# Altium PCB board_supply_440v.PcbDoc
Units mm, origin at the board's own origin, x right, y up, seen from the top; angles counter-clockwise.
Board outline 47 x 77.5 mm, 2 copper layers (Top Layer, Bottom Layer), stack 1.48 mm thick; 106 components, 48 nets, 252 pads, 62 vias.
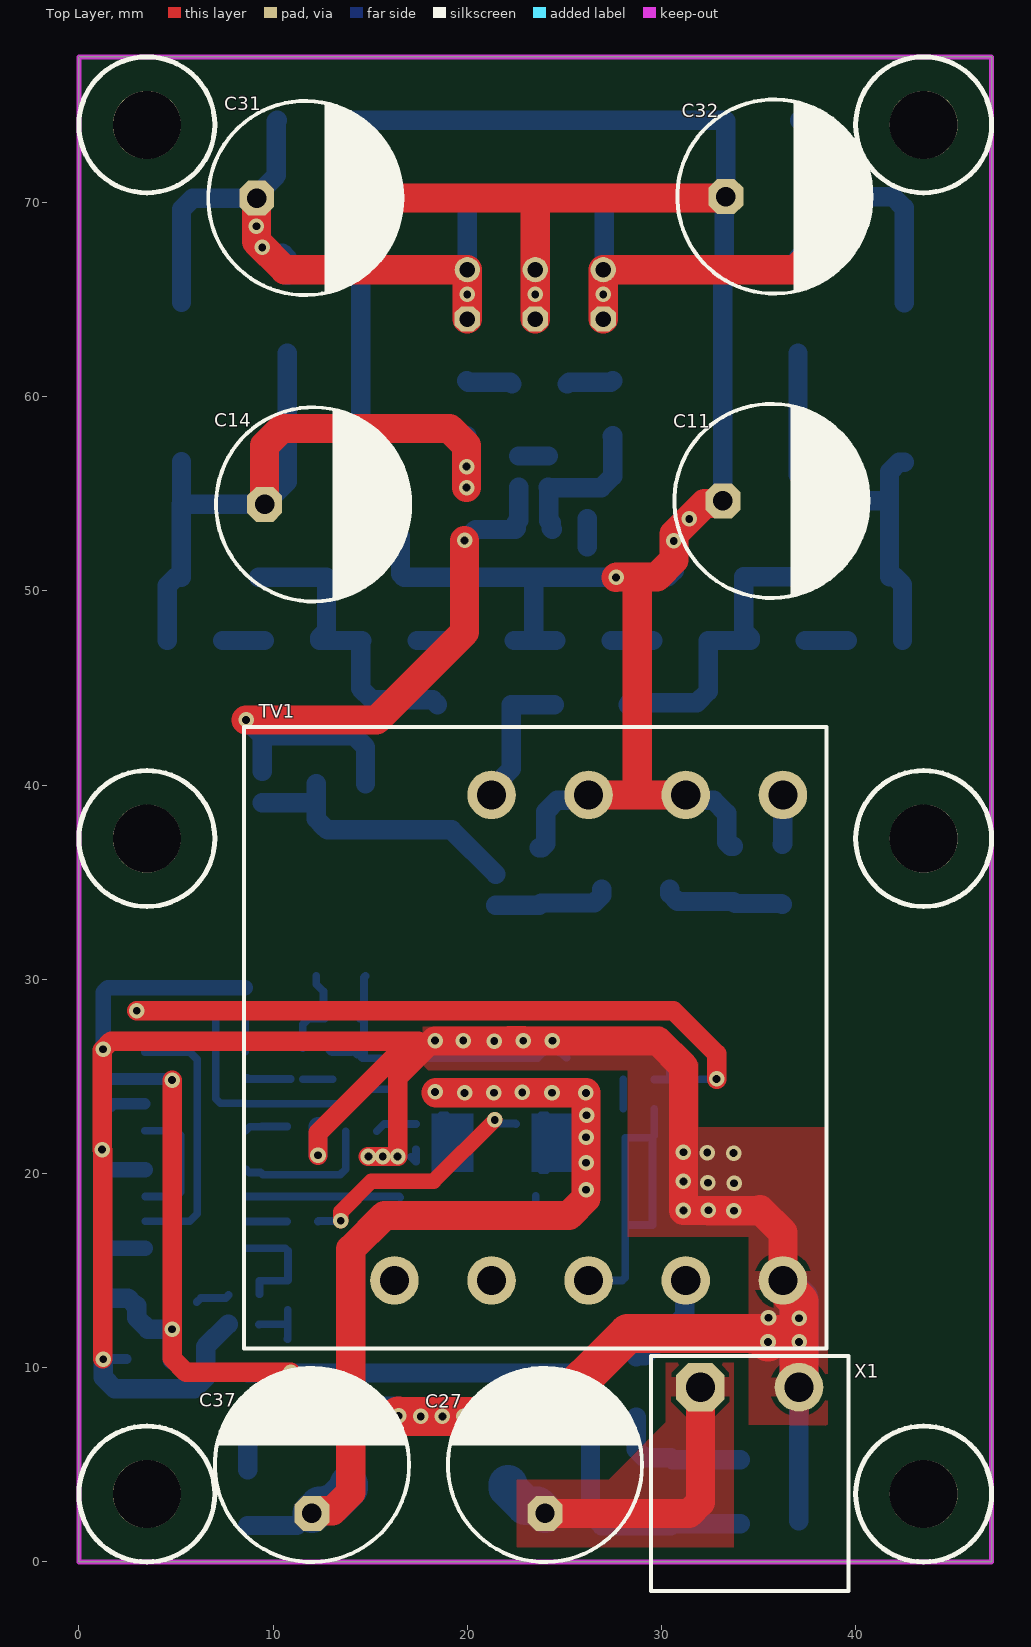
[diagram p0: Top Layer view]
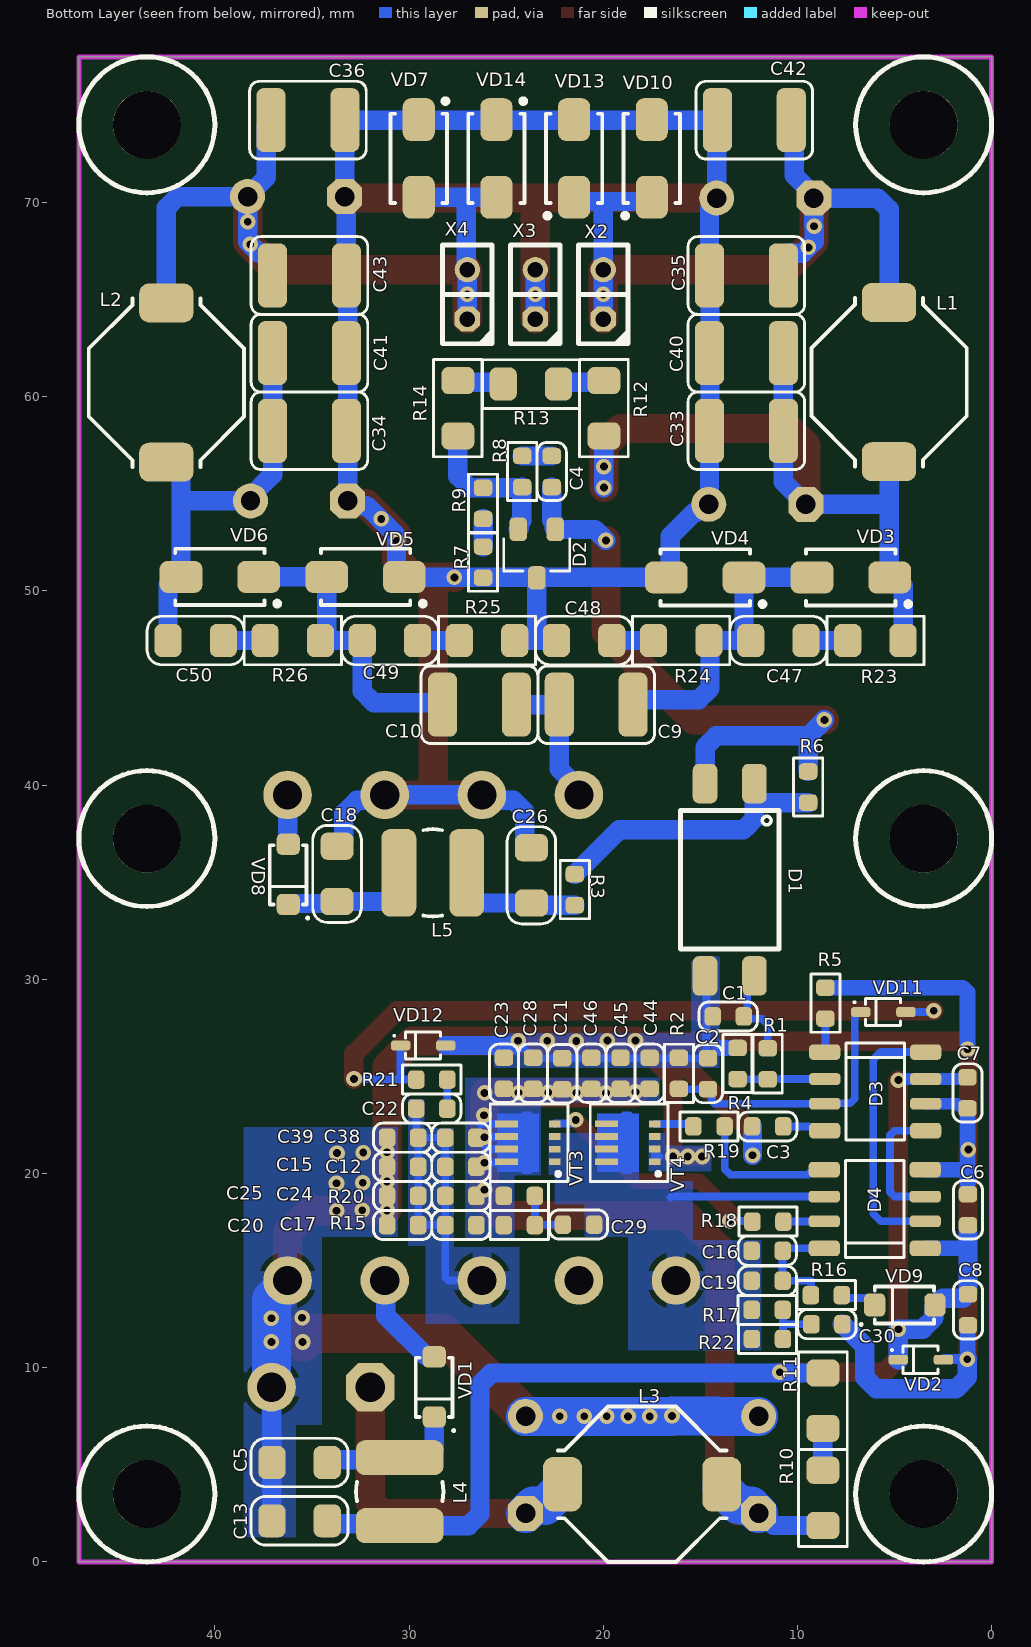
[diagram p1: Bottom Layer view, seen from below]
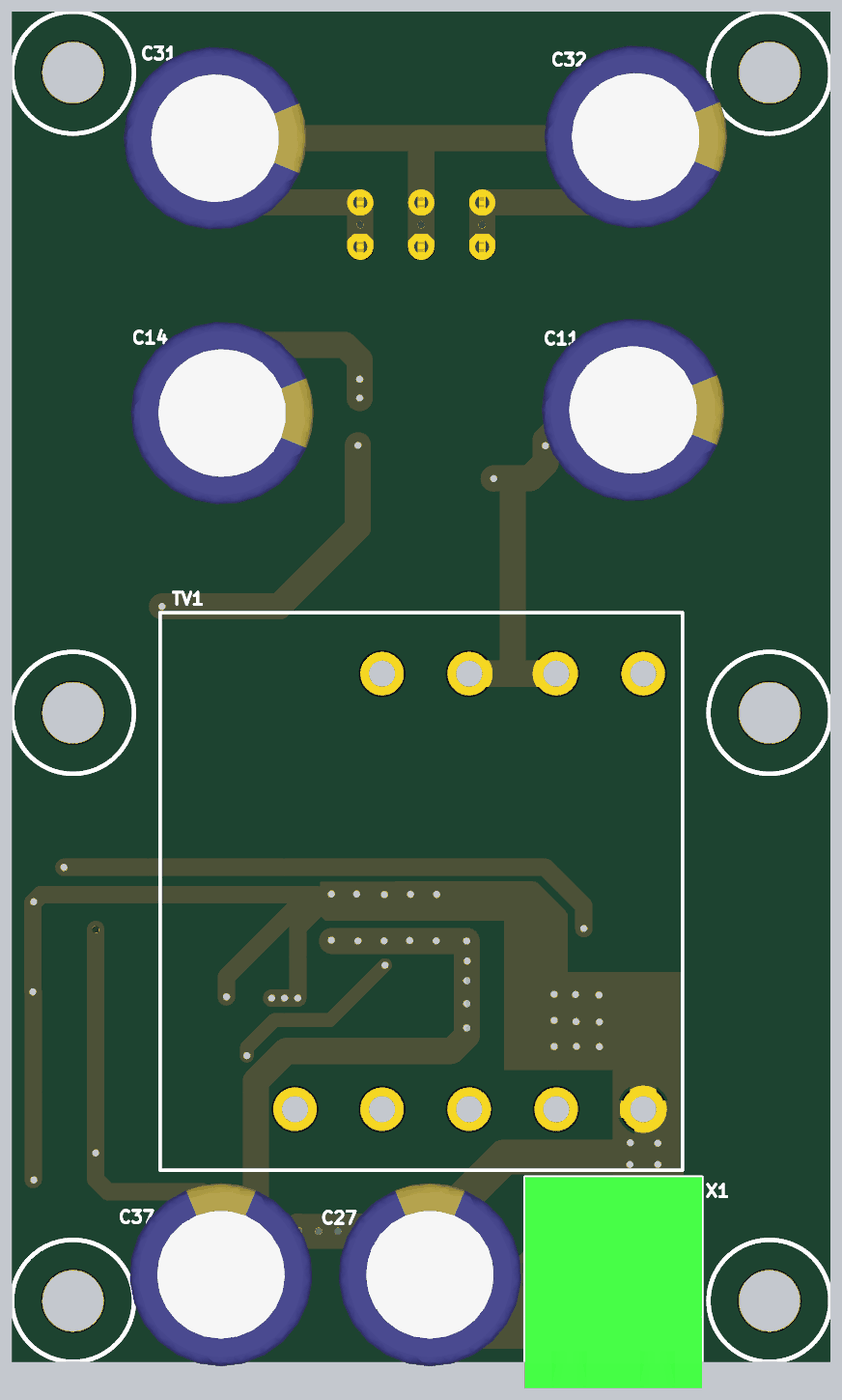
[diagram p2: 3D render of the assembled board from above, using the file's embedded part models]
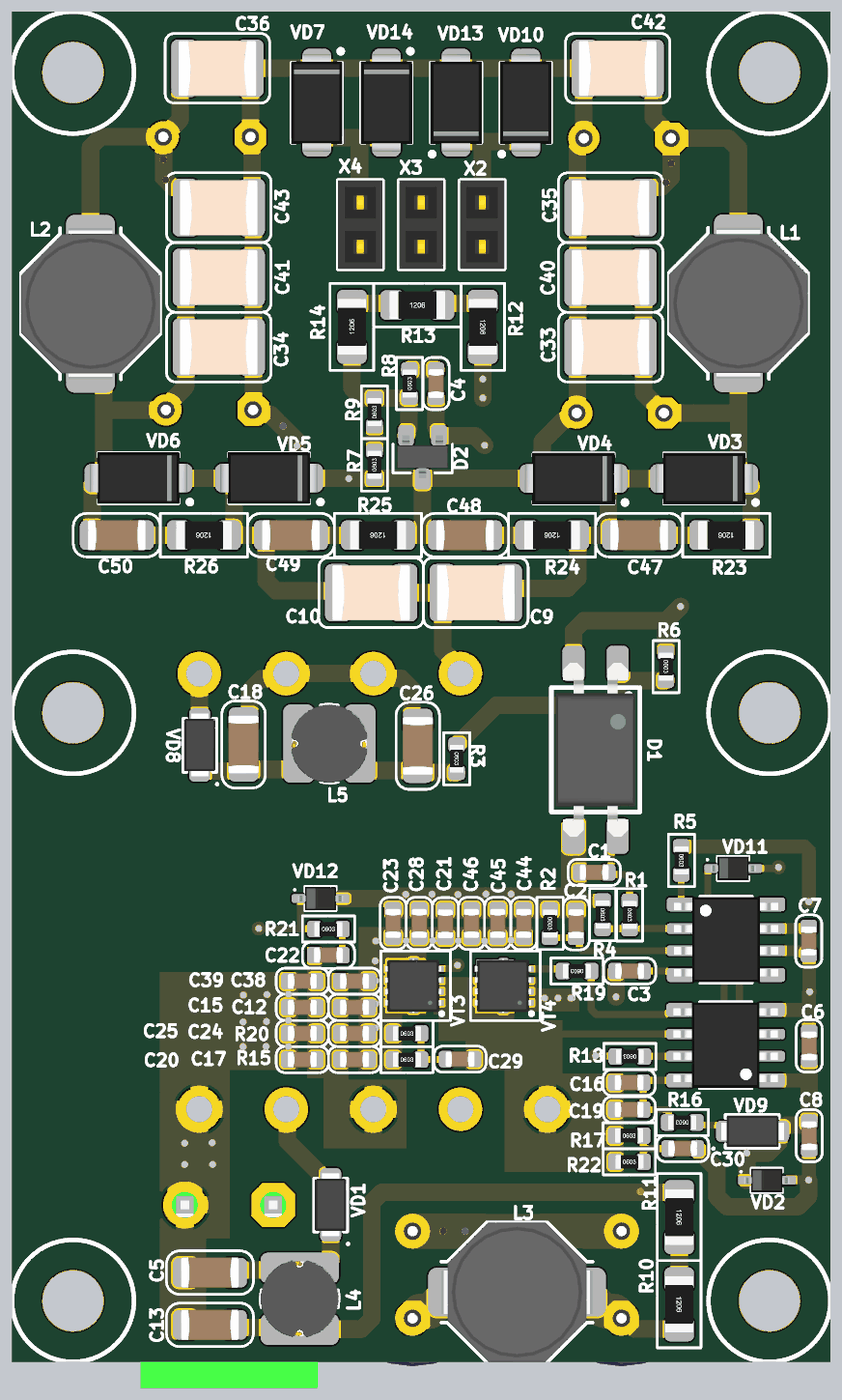
[diagram p3: 3D render of the assembled board from below, using the file's embedded part models]

## Layer stack, top to bottom
Top Solder: solder mask 0.0102, Solder Resist, Dk 3.5
Top Layer: signal copper 0.0356
Dielectric 1: dielectric 1.4086, FR-4, Dk 4.8
Bottom Layer: signal copper 0.0356
Bottom Solder: solder mask 0.0102, Solder Resist, Dk 3.5

## Board outline
0,0 0,77.5 47,77.5 47,0

## Design rules (kind name [scope] priority, off if disabled: settings)
Clearance PRIM_SEC [InNetClass('PRIM') vs InNetClass('SEC')] p1: gap=6 ignorepadtopadclearanceinfootprint=FALSE
Clearance HOLE [OnLayer('Keep-Out Layer') vs AsMM(HoleDiameter) >3] p2: gap=0.25 ignorepadtopadclearanceinfootprint=TRUE
Clearance HV_SEC [InNet('+450В') or InNet('OUT1.1') or InNet('-450В') or InNet('-400В') or InNet('BASE1.1') vs InNet('BASE1.2') or InNet('GND_SEC')or InNet('MID')] p3: gap=2 ignorepadtopadclearanceinfootprint=FALSE
Clearance +HV_-HV [InNet('+450В') or InNet('OUT1.1') or InNet('BASE1.1') vs InNet('-450В')] p4: gap=4 ignorepadtopadclearanceinfootprint=TRUE
Clearance HV_MID [InNet('MID1') or InNet('MID2') or InNet('MID2_VD')  or InNet('MID2_VD')] p5: gap=1 ignorepadtopadclearanceinfootprint=FALSE
Clearance Keep-Out [OnLayer('Top Layer') OR OnLayer('Bottom Layer') vs OnLayer('Keep-Out Layer')] p6: gap=0.5 ignorepadtopadclearanceinfootprint=FALSE
Clearance [All] p7: gap=0.25 ignorepadtopadclearanceinfootprint=FALSE
ComponentClearance [All] p1: gap=0 collisioncheckmode=3 verticalgap=0 showdistances=FALSE
Height [All] p1: minheight=0 maxheight=70 prefheight=12.7
HoleSize [All] p1: absolutevalues=TRUE maxlimit=4 minlimit=0.025 maxpercent=80.000 minpercent=20.000
PolygonConnect [All] p1: thpad.connectstyle=Relief thpad.reliefconductorwidth=1 thpad.reliefentries=4 thpad.polygonreliefangle="90 Angle" thpad.airgapwidth=0.25 smdpad.connectstyle=Direct smdpad.reliefconductorwidth=0.4 smdpad.reliefentries=4 smdpad.polygonreliefangle="90 Angle" smdpad.airgapwidth=0.3 via.connectstyle=Direct via.reliefconductorwidth=0.254 via.reliefentries=4 via.polygonreliefangle="90 Angle" via.airgapwidth=0.254
RoutingVias [All] p1: holewidth=0.4 width=0.8 viastyle="Through Hole" minholewidth=0.3 minwidth=0.6 maxholewidth=1 maxwidth=2
SolderMaskExpansion [All] p1: expansion=0.102 istentingtop=FALSE
Width [All] p1: maxlimit=5 minlimit=0.25 preferedwidth=0.8 bottomlayer_prefwidth=0.4 minimp=50.000000 maximp=50.000000 favimp=50.000000
27 further rules are at their usual default settings.

## Classes and differential pairs
net class SEC: +12В +450В -450В GND_SEC NetC4_1 NetC4_2 NetC9_1 NetC9_2 NetC10_1 NetC18_1 NetC31_1 NetC32_2 NetC47_2 NetC48_2 NetC49_2 NetC50_2 NetD1_1 NetD2_2 NetR7_2 NetR12_1 NetR13_1 NetTV1_7 NetX2_4 NetX3_4
net class PRIM: 100В +12В_PRIM GND NetC1_2 NetC3_2 NetC5_1 NetC12_1 NetC16_1 NetC16_2 NetC22_2 NetC27_1 NetC29_2 NetC30_2 NetD3_1 NetD3_2 NetD3_5 NetD3_8 NetD4_5 NetD4_7 NetR10_1 NetR16_1 NetR18_2 NetR19_2 NetR21_1 NetTV1_5 NetX1_2 OC

## Components (designator, comment, footprint, x,y, rotation, side; value= is the part's Value field where it differs from the comment)
C1 "*" C-0603 13.564,28.092 r180 bottom
C2 "*" C-0603 14.605,25.146 r270 bottom
C3 "*" C-0603 11.532,22.428 r180 bottom
C4 "*" C-0603 22.649,56.15 r270 bottom
C5 "22мк" C-1206 35.636,5.123 r0 bottom
C6 "*" C-0603 1.219,18.136 r270 bottom
C7 "*" C-0603 1.245,24.155 r90 bottom
C8 "*" C-0603 1.219,12.979 r90 bottom
C9 "0.1мк" C-1812 20.364,44.144 r0 bottom
C10 "0.1мк" C-1812 26.374,44.144 r180 bottom
C11 "10мк" "CAP: D10C5H16" 35.662,54.635 r0 top
C12 "*" C-0603 27.33,20.348 r180 bottom
C13 "22мк" C-1206 35.636,2.123 r0 bottom
C14 "10мк" "CAP: D10C5H16" 12.065,54.458 r0 top
C15 "*" C-0603 30.33,20.348 r180 bottom
C16 "*" C-0603 11.557,16.027 r180 bottom
C17 "*" C-0603 27.33,17.348 r180 bottom
C18 "22мк" C-1206 33.706,35.433 r90 bottom
C19 "*" C-0603 11.557,14.478 r180 bottom
C20 "*" C-0603 30.33,17.348 r180 bottom
C21 "*" C-0603 22.112,25.143 r270 bottom
C22 "*" C-0603 28.829,23.343 r180 bottom
C23 "*" C-0603 25.112,25.165 r270 bottom
C24 "*" C-0603 27.33,18.848 r180 bottom
C25 "*" C-0603 30.33,18.848 r180 bottom
C26 "22мк" C-1206 23.698,35.357 r90 bottom
C27 "22мк" "CAP: D10C5H16" 24,5 r90 top
C28 "*" C-0603 23.612,25.165 r270 bottom
C29 "*" C-0603 21.273,17.374 r0 bottom
C30 "*" C-0603 8.484,12.243 r0 bottom
C31 "10мк" "CAP: D10C5H16" 11.659,70.231 r0 top
C32 "10мк" "CAP: D10C5H16" 35.814,70.307 r0 top
C33 "0.1мк" C-1812 12.627,58.245 r0 bottom
C34 "0.1мк" C-1812 35.127,58.245 r0 bottom
C35 "0.1мк" C-1812 12.627,66.245 r0 bottom
C36 "0.1мк" C-1812 35.204,74.244 r0 bottom
C37 "22мк" "CAP: D10C5H16" 12,5 r90 top
C38 "*" C-0603 27.33,21.848 r180 bottom
C39 "*" C-0603 30.33,21.848 r180 bottom
C40 "0.1мк" C-1812 12.627,62.245 r0 bottom
C41 "0.1мк" C-1812 35.127,62.245 r0 bottom
C42 "0.1мк" C-1812 12.217,74.244 r0 bottom
C43 "0.1мк" C-1812 35.127,66.245 r0 bottom
C44 "*" C-0603 17.612,25.165 r270 bottom
C45 "*" C-0603 19.112,25.165 r270 bottom
C46 "*" C-0603 20.612,25.165 r270 bottom
C47 "*" C-1206 10.984,47.448 r180 bottom
C48 "*" C-1206 20.984,47.448 r180 bottom
C49 "*" C-1206 30.984,47.448 r180 bottom
C50 "*" C-1206 40.984,47.448 r180 bottom
D1 "PC817" DIP4-SMD 13.487,35.128 r270 bottom
D2 "TL431DBZ" SOT-23-3 23.422,51.923 r270 bottom
D3 "UCC25600" 8-SOIC 5.995,24.232 r180 bottom
D4 "IRS21867S" 8-SOIC 6.02,18.178 r0 bottom
L1 "CDRH8D43" L-8.3x8.3x4.5 5.283,60.757 r270 bottom
L2 "CDRH8D43" L-8.3x8.3x4.5 42.494,60.731 r270 bottom
L3 "CDRH8D43" L-8.3x8.3x4.5 18,4 r0 bottom
L4 "SDR0403-3R9ML" L-4.5x4x3.2 30.48,3.621 r90 bottom
L5 "SDR0403-3R9ML" L-4.5x4x3.2 28.778,35.484 r0 bottom
R1 "*" R-0603 11.532,25.654 r270 bottom
R2 "*" R-0603 16.104,25.159 r270 bottom
R3 "*" R-0603 21.463,34.62 r270 bottom
R4 "*" R-0603 13.081,25.667 r270 bottom
R5 "*" R-0603 8.56,28.778 r270 bottom
R6 "*" R-0603 9.449,39.903 r270 bottom
R7 "*" R-0603 26.187,51.486 r90 bottom
R8 "*" R-0603 24.173,56.15 r90 bottom
R9 "*" R-0603 26.187,54.508 r90 bottom
R10 "20к" R-1206 8.687,3.302 r270 bottom
R11 "20к" R-1206 8.687,8.306 r270 bottom
R12 "180к" R-1206 19.964,59.408 r270 bottom
R13 "180к" R-1206 23.726,60.655 r180 bottom
R14 "180к" R-1206 27.483,59.408 r90 bottom
R15 "*" R-0603 24.319,17.348 r180 bottom
R16 "*" R-0603 8.509,13.741 r0 bottom
R17 "*" R-0603 11.557,12.979 r180 bottom
R18 "*" R-0603 11.519,17.526 r0 bottom
R19 "*" R-0603 14.554,22.428 r0 bottom
R20 "*" R-0603 24.319,18.848 r180 bottom
R21 "*" R-0603 28.829,24.841 r180 bottom
R22 "*" R-0603 11.544,11.481 r180 bottom
R23 "*" R-1206 5.984,47.448 r0 bottom
R24 "*" R-1206 15.984,47.448 r0 bottom
R25 "*" R-1206 25.984,47.448 r0 bottom
R26 "*" R-1206 35.984,47.448 r0 bottom
TV1 "2xT26.9/14.7/11.2" EE30 23.5,27 r0 top locked
VD1 "MBR0540" SOD-123FL 28.702,9.017 r90 bottom
VD2 "14В" SOD-323 3.658,10.414 r180 bottom
VD3 "MURA160T3G" DO-214AC 7.25,50.698 r0 bottom
VD4 "MURA160T3G" DO-214AC 14.75,50.698 r0 bottom
VD5 "MURA160T3G" DO-214AC 32.24,50.724 r0 bottom
VD6 "MURA160T3G" DO-214AC 39.74,50.724 r0 bottom
VD7 "P4SMAJ440A" DO-214AC 29.5,72.271 r270 bottom
VD8 "MBR0540" SOD-123FL 36.22,35.408 r90 bottom
VD9 "MBR0540" SOD-123FL 4.47,13.233 r180 bottom
VD10 "P4SMAJ440A" DO-214AC 17.5,72.271 r90 bottom
VD11 "1N4148WS" SOD-323 5.588,28.321 r180 bottom
VD12 "1N4148WS" SOD-323 29.286,26.594 r180 bottom
VD13 "P4SMAJ440A" DO-214AC 21.5,72.271 r90 bottom
VD14 "P4SMAJ440A" DO-214AC 25.5,72.271 r270 bottom
VT3 "__GENERIC-N" WDFN-8 23.82,21.583 r90 bottom
VT4 "__GENERIC-N" WDFN-8 18.669,21.585 r90 bottom
X1 "2EDGR-5.08-02P-14" 2EDGR-5.08-02P-14-00AH 32,9 r0 top
X2 "PBS-2" PBS-2 20,64 r90 bottom
X3 "PBS-2" PBS-2 23.5,64 r90 bottom
X4 "PBS-2" PBS-2 27,64 r90 bottom

## Footprints (in the part's own frame and the unit in brackets; to place one, negate y for a bottom-side part, rotate by r counter-clockwise, add the part's x,y. Pads: shape width x height; smd on the part's side, far side on the other; paste and mask are expansions set on the pad)
2EDGR-5.08-02P-14-00AH [mm]
  oct 2.5x2.5 hole 1.5: 1(0,0)
  round 2.5 hole 1.5: 2(5.08,0)
  silkscreen extent -2.54,-10.5 7.62,1.6, body extent -2.54,-10.5 7.62,1.6, height 8.25
8-SOIC [mm] "SOIC, 8-Leads, Body 4,90x3,90mm, Pitch 1,27mm, IPC Medium Density"
  rrect50% 1.6x0.8 smd: 1(-2.6,2.025) 4(-2.6,-2.025) 5(2.6,-2.025) 8(2.6,2.025)
  rrect50% 1.6x0.6 smd: 2(-2.6,0.635) 3(-2.6,-0.635) 6(2.6,-0.635) 7(2.6,0.635)
  silkscreen extent -1.5,-2.5 1.5,2.5, body extent -3,-2.45 3,2.45, height 1.75
C-0603 [mm] "Chip Capacitor, 2-Leads, Body 1,60x0,83mm, IPC Medium Density"
  rrect50% 0.85x0.95 smd: 1(-0.8,0) 2(0.8,0)
  silkscreen extent -1.5,-0.75 1.5,0.75, body extent -0.85,-0.45 0.85,0.45, height 0.9
C-1206 [mm] "Chip Capasitor, 2-Leads, Body 3,20x1,60mm, IPC Medium Density"
  rrect50% 1.4x1.7 smd: 1(-1.425,0) 2(1.425,0)
  silkscreen extent -2.5,-1.25 2.5,1.25, body extent -1.67,-0.87 1.68,0.88, height 1.75
C-1812 [mm] "Chip Capacitor, 2-Leads, Body 4,50x3,20mm, IPC Medium Density"
  rrect50% 1.5x3.3 smd: 1(-1.9,0) 2(1.9,0)
  silkscreen extent -3,-2 3,2, body extent -2.25,-1.6 2.25,1.6, height 2.81
"CAP: D10C5H16" [mm]
  oct 1.8x1.8 hole 1: 1(-2.5,0)
  round 1.8 hole 1: 2(2.5,0)
  silkscreen extent -5,-5 5,5, body extent -5.25,-5.25 5.25,5.25, height 17.55
DIP4-SMD [mil]
  rrect50% 80x50 smd: 1(-195,50) 2(-195,-50) 3(195,-50) 4(195,50)
  silkscreen extent -141,-100 141,100, body extent -197,-90 197,90, height 152
DO-214AC [mm] "SMA 2-Leads, Body 2,55x5,00mm, IPC Medium Density"
  rrect50% 2.2x1.65 smd: 1(2,0) 2(-2,0)
  silkscreen extent -3.07,-1.45 2.3,1.5, body extent -2.8,-1.47 2.8,1.48, height 2.7
EE30 [mm]
  round 2.5 hole 1.5 paste-25.4: 2(-7.25,-12.5) 3(-2.25,-12.5) 4(2.75,-12.5) 5(7.75,-12.5) 6(12.75,-12.5) 7(12.75,12.5) 8(7.75,12.5) 9(2.75,12.5) 10(-2.25,12.5)
  silkscreen extent -15,-16 15,16, body extent -15.05,-16 15.05,16, height 21.25
L-4.5x4x3.2 [mm]
  rrect50% 1.8x4.5 smd: 1(-1.75,0) 2(1.75,0)
  silkscreen extent -0.49,-2.25 0.49,2.25, body extent -2.2,-2.25 2.2,2.25, height 3.25
L-8.3x8.3x4.5 [mm] "Дроссель SMD"
  rrect50% 2x2.8 smd: 1(-4.1,0) 2(4.1,0)
  silkscreen extent -4.34,-4 4.34,4, body extent -4.34,-4 4.34,4, height 4.5
PBS-2 [mm]
  oct 1.3x1.3 hole 0.8: 1(0,0)
  round 1.3 hole 0.8: 2(2.54,0)
  silkscreen extent -1.27,-1.27 3.81,1.27, body extent -1.27,-1.27 3.81,1.27, height 8.55
R-0603 [mm] "Chip Capacitor, 2-Leads, Body 1,60x0,83mm, IPC Medium Density"
  rrect50% 0.85x0.95 smd: 1(-0.8,0) 2(0.8,0)
  silkscreen extent -1.5,-0.75 1.5,0.75, body extent -0.8,-0.4 0.8,0.4, height 0.45
R-1206 [mm] "Chip Resistor, 2-Leads, Body 3,20x1,60mm, IPC Medium Density"
  rrect50% 1.4x1.7 smd: 1(-1.425,0) 2(1.425,0)
  silkscreen extent -2.5,-1.25 2.5,1.25, body extent -1.6,-0.8 1.6,0.8, height 0.6
SOD-123FL [mm] "SODFL, 2-Leads, Body 1,70x3,60mm, IPC Medium Density"
  rrect50% 1.1x1.2 smd: 1(1.55,0) 2(-1.55,0)
  silkscreen extent -2.3,-1.05 1.5,0.95, body extent -1.8,-0.9 1.8,0.9, height 1.3
SOD-323 [mm] "SOD-323 SODFL, 2-Leads, Body 1,30x2,60mm, IPC Medium Density"
  rrect50% 1x0.5 smd: 1(1.175,0) 2(-1.15,0)
  silkscreen extent -1.52,-0.7 0.9,0.7, body extent -1.3,-0.67 1.3,0.67, height 1.1
SOT-23-3 [mm] "SOT23, 3-Leads, Body 2,90x2,30mm, Pitch 0,95mm, IPC Medium Density"
  rrect50% 1.2x0.9 smd: 1(-1.25,0.95) 2(-1.25,-0.95) 3(1.25,0)
  silkscreen extent -0.75,-1.7 0.9,1.7, body extent -1.27,-1.46 1.21,1.46, height 1
WDFN-8 [mm]
  rect 0.35x1.2 smd: D(-0.973,1.166) D(-0.323,1.166) D(0.327,1.166) D(0.977,1.166)
  rect 0.35x0.6 smd: G(0.973,-1.316) S(-0.977,-1.316) S(-0.327,-1.316) S(0.323,-1.316)
  Top Layer region: -1.5,-0.5 -1.5,-0.186 -1.6,-0.086 -1.6,0.318 -1.5,0.417 -1.5,1.65 1.5,1.65 1.5,0.417 1.6,0.318 1.6,-0.086 1.5,-0.187 1.5,-0.5
  silkscreen extent -2,-2 2,2, body extent -1.55,-1.47 1.55,1.73, height 0.8

## Part data
C1 C2 C3 C4 C6 C7 C8 C12 C15 C16 C17 C19 C20 C21 C22 C23 C24 C25 C28 C29 C30 C38 C39 C44 C45 C46: library part C0603, Package=C-0603, ComponentDescription="Конденсатор керамический SMD, C-0603, *В, *, *", ComponentType="Конденсатор керамический SMD"
C5 C13 C18 C26: library part C1206, Dielectric=X7R, Package=C-1206, Voltage=25, ComponentDescription="Конденсатор керамический SMD, C-1206, 25В, 22мк, X7R", ComponentType="Конденсатор керамический SMD"
C9 C10 C33 C34 C35 C36 C40 C41 C42 C43: library part C1812, Dielectric=X7R, Package=C-1812, Voltage=630, ComponentDescription="Конденсатор керамический SMD, C-1812, 630В, 0.1мк, X7R", ComponentType="Конденсатор керамический SMD"
C11 C14 C31 C32: library part "Aluminum electrolytic capacitor", "Конденсатор электролитический", Package="CAP: D13C5H25", Voltage=500В, ComponentDescription="Конденсатор электролитический, 10мк, 500В, ESR, CAP: D13C5H25", ComponentType="Конденсатор электролитический", Type=ESR
C27 C37: library part "Aluminum electrolytic capacitor", "Конденсатор электролитический", Package="CAP: D10C5H16", Voltage=160В, ComponentDescription="Конденсатор электролитический, 22мк, 160В, ESR, CAP: D10C5H16", ComponentType="Конденсатор электролитический", Type=ESR
C47 C48 C49 C50: library part C1206, Package=C-1206, ComponentDescription="Конденсатор керамический SMD, C-1206, *В, *, *", ComponentType="Конденсатор керамический SMD"
D1: "Оптрон с транзисторным выходом", Package=DIP4-SMD, ComponentDescription="Оптрон с транзисторным выходом, PC817, DIP4-SMD", ComponentType="Оптрон с транзисторным выходом"
D2: "Микросхема ИОН", Package=SOT-23-3, ComponentDescription="Микросхема ИОН, TL431DBZ, SOT-23-3", ComponentType="Микросхема ИОН"
D3: "Микросхема контроллер LLC", Package=8-SOIC, ComponentDescription="Микросхема контроллер PWM, UCC25600, 8-SOIC", ComponentTypе="Микросхема контроллер PWM"
D4: "Микросхема полумостовой драйвер", Package=8-SOIC, ComponentDescription="Микросхема контроллер PWM, IRS21867S, 8-SOIC", ComponentTypе="Микросхема контроллер PWM"
L1 L2 L3: "SMD дроссель", Package=L-8.3x8.3x4.5, ComponentDescription="SMD дроссель, CDRH8D43, L-8.3x8.3x4.5", ComponentTypе="SMD дроссель"
L4 L5: Package=L-4.5x4x3.2, ComponentDescription="ЭМИ фильтр индуктивный, SDR0403-3R9ML, L-4.5x4x3.2", ComponentTypе="ЭМИ фильтр индуктивный"
R1 R2 R3 R4 R5 R6 R7 R8 R9 R15 R16 R17 R18 R19 R20 R21 R22: library part R0603, "Резистор SMD", Package=R-0603, Tolerance=5%, ComponentDescription="Резистор SMD, R-0603, *Ом, 5%", ComponentType="Резистор SMD"
R10 R11 R12 R13 R14 R23 R24 R25 R26: library part R1206, "Резистор SMD", Package=R-1206, Tolerance=5%, ComponentType="Резистор SMD"
  R10 R11: ComponentDescription="Резистор SMD, R-1206, 20кОм, 5%"
  R12 R13 R14: ComponentDescription="Резистор SMD, R-1206, 180кОм, 5%"
  R23 R24 R25 R26: ComponentDescription="Резистор SMD, R-1206, *Ом, 5%"
TV1: "Трансформатор для board_supply_440v", ComponentDescription=2xT26.9/14.7/11.2
VD1 VD8 VD9: "Диод выпрямительный одиночный", Package=SOD-123FL, =ComponentType="Диод выпрямительный одиночный", ComponentDescription=", MBR0540, SOD-123FL"
VD2: library part MM3Z, "Диод Зенера (стабилитрон)", Package=SOD-323, ComponentDescription="Диод Зенера (стабилитрон), MM3Z 14В, SOD-323", ComponentName=MM3Z, ComponentType="Диод Зенера (стабилитрон)"
VD3 VD4 VD5 VD6: "Диод выпрямительный одиночный", Package=DO-214AC, ComponentDescription="Диод выпрямительный одиночный, MURA160T3G, DO-214AC", ComponentType="Диод выпрямительный одиночный"
VD7 VD10 VD13 VD14: library part P4SMAJ-XX-A, "Защитный диод униполярный", Package=DO-214AC, ComponentDescription="Защитный диод униполярный, P4SMAJ440A, DO-214AC", ComponentType="Защитный диод униполярный"
VD11 VD12: "Диод выпрямительный одиночный", Package=SOD-323, ComponentDescription="Диод выпрямительный одиночный, 1N4148WS, SOD-323", ComponentType="Диод выпрямительный одиночный"
VT3 VT4: "Транзистор МОП, одиночный, N-канальный", Package=WDFN-8, ChannelType=N-канальный, ComponentDescription="Транзистор МОП, одиночный, N-канальный, __GENERIC-N, WDFN-8", ComponentType="Транзистор МОП, одиночный"
X1: library part 2EDGR-5.08-02P-14-00AH, "Разъем разрывной", ComponentDescription="Разъём, 2EDGR-5.08-02P-14", ComponentTypе=Разъём
X2 X3 X4: "Разъём штыревой", ComponentDescription="Разъём штыревой, PBS-2", ComponentTypе="Разъём штыревой"

## Free pads (board coordinates)
  round 3.5 hole 3.5: O1(3.5,3.5) O1(3.5,37.25) O1(3.5,74) O1(43.5,3.5) O1(43.5,37.25) O1(43.5,74)

## Via types
v1: diameter 0.8, hole 0.4, Top Layer to Bottom Layer, tented both sides, 62 vias

## Nets (pads, with @x,y where several pads share a name; then routed paths per layer and width w, separated by ;. In a path a pad name is that pad's centre, name@x,y a point inside that pad or via, vN(x,y) a via of type N, cw(c..) or ccw(c..) an arc to the next point about the centre after c; other vN are vias at no path point)
100В: C12.2 C17.2 C21.2 C23.2 C24.2 C28.2 C37.1 C38.2 C44.2 C45.2 C46.2 L3.1 R10.2 R15.1 R20.1 VT3.D | length 53.9
  Top Layer w1: v1@26.103,24.163 v1(26.111,24.155)
  Top Layer w1.5: C37.1 12.139,2.639 13.055,2.639 14,3.584 14,16.108 15.736,17.844 25.233,17.844 26.113,18.725 v1(26.113,19.169) 26.113,20.554 26.111,20.556 26.111,23.008 v1(26.111,24.155) ; v1@18.382,24.163 v1(21.372,24.163) v1(24.362,24.163) v1@26.103,24.163
  Bottom Layer w0.4: VT3.D@24.985,20.61 25.035,20.56 26.319,20.56 C12.2 ; VT3.D@24.985,21.26 25.945,21.26 26.53,21.846 C38.2 26.499,21.879 25.016,21.879 VT3.D@24.985,21.91 ; VT3.D@24.985,22.56 26.284,22.56 26.314,22.53
  Bottom Layer w1: R10.2 11.22,1.877 11.843,2.5 C37.1
  Bottom Layer w2: C37.1 12.398,2.898 12.798,2.898 12.856,2.956 13.054,2.956 13.9,3.803 L3.1
  other v1: 26.115,20.556 26.115,21.875 26.141,23.008 19.863,24.155 22.835,24.181 18.339,24.206
+12В: C26.1 L5.1 R3.2 | length 6
  Bottom Layer w1: R3.2 23.698,33.82 23.81,33.932 26.527,33.932 26.927,34.332 L5.1@26.927,34.646
+12В_PRIM: C6.2 C7.2 C8.2 C13.1 D3.7 D4.1 L4.1 R11.1 VD2.2 VD9.1 | length 69.4
  Top Layer w1: v1(4.801,24.816) 4.801,10.489 5.523,9.766 v1(10.909,9.766)
  Bottom Layer w0.4: C6.2@1.219,16.936 1.219,16.3 1.366,16.153 ; D4.1@3.391,16.124 D4.1 ; L4.1 L4.1@30.581,1.972 ; C13.1@34.061,1.972 C13.1
  Bottom Layer w0.6: C7.2 1.333,24.867 D3.7 ; D3.7@3.572,24.867 4.696,24.867 4.746,24.816 v1(4.801,24.816)
  Bottom Layer w0.8: 1.366,16.153 D4.1
  Bottom Layer w1: C6.2@1.219,16.935 1.219,16.3 1.219,13.843 1.473,13.589 2.53,13.589 2.823,13.296 2.924,13.195 2.92,13.183 VD9.1 2.97,13.183 2.97,12.575 3.556,11.989 v1(4.801,11.989) ; VD2.2 v1@4.808,11.982 ; R11.1 25.76,9.731 26.345,9.145 26.345,2.457 26.931,1.871 L4.1 ; L4.1@30.581,1.972 C13.1@34.061,1.972
+450В: C14.1 C33.1 C40.1 L1.2 R12.2 R23.1 VD3.2 | length 41.2
  Top Layer w1.5: C14.1 9.565,57.491 10.444,58.369 19.086,58.369 19.964,57.491 v1(19.964,55.321)
  Bottom Layer w1: R23.1 4.559,50.282 4.975,50.698 VD3.2 5.267,50.715 5.267,54.458 ; L1.2 5.283,54.458 C14.1 10.727,55.62 C33.1 C40.1 ; v1(19.964,55.321) R12.2
  other v1: 19.964,56.406
-450В: C11.2 C34.2 C41.2 C50.1 L2.2 VD6.1 | length 21.8
  Bottom Layer w1: C41.2 C34.2 37.027,55.986 38.162,54.852 C11.2 41.511,54.635 41.74,54.407 ; C50.1 42.409,50.329 42.015,50.724 VD6.1 41.74,54.407 ; L2.2 42.24,56.631 41.74,56.131 41.74,54.407
GND: C1.1 C2.1 C3.1 C5.2 C6.1 C7.1 C8.1 C13.2 C15.1 C20.1 C21.1 C23.1 C25.1 C27.2 C28.1 C30.1 C37.2 C39.1 C44.1 C45.1 C46.1 D1.3 D3.6 D4.4 R2.1 R4.1 R5.1 TV1.6 VD2.1 VD12.1 VT4.S X1.2 | length 189.2
  Top Layer w0.8: v1(1.194,21.234) v1@1.219,21.209 ; v1@1.194,26.354 v1(1.245,26.405) ; v1@1.219,10.471 v1(1.251,10.439) ; 17.507,26.848 17.481,26.822 18.313,26.822 v1(18.339,26.848) ; 22.128,26.822 22.144,26.839 ; v1@22.894,26.848 v1@22.907,26.834
  Top Layer w1: v1(1.194,21.234) v1@1.194,26.354 ; v1@1.219,10.471 v1@1.219,21.209 ; v1(1.245,26.405) 1.662,26.822 17.481,26.822 ; v1(12.313,20.949) 12.313,22.092 17.043,26.822 ; v1(14.91,20.879) v1(15.646,20.879) v1(16.408,20.879) 16.408,24.917 v1@18.313,26.822
  Top Layer w1.5: v1@18.339,26.822 19.787,26.822 v1(21.387,26.822) 22.128,26.822 ; 22.144,26.839 v1(22.885,26.839) ; v1@22.907,26.834 v1(24.386,26.834) 29.806,26.834 31.13,25.51 v1(31.13,21.098) v1(31.13,19.598) v1(31.13,18.098) 32.414,18.098 32.428,18.085 v1(33.731,18.085) 35.027,18.085 35.077,18.136 36.25,16.963 TV1.6 ; X1.2 X1.2@37.08,9.173
  Top Layer w2: v1(16.459,7.518) 16.485,7.493 v1(18.72,7.493) 19.812,7.493 v1(19.819,7.5) v1(20.98,7.5) v1(22.243,7.5) C27.2 28.26,11.76 35.052,11.76 v1(35.484,11.328) 35.865,11.709 36.93,11.709 ; TV1.6@36.059,14.421 37.08,13.399 37.08,11.709 37.08,11.331 X1.2@37.08,9.323
  Bottom Layer w0.4: C8.1 C8.1@1.235,12.163 ; v1@1.219,21.26 v1(1.194,21.234) v1@1.232,21.196 ; v1@1.235,10.455 v1(1.251,10.439) ; v1@1.26,10.431 v1(1.251,10.439) ; v1@1.264,10.452 v1(1.251,10.439) ; VD2.1@2.47,10.401 VD2.1 ; 13.987,26.467 14.333,26.121 14.43,26.121 C2.1 ; C1.1 C1.1@14.465,27.991 ; C1.1@14.586,27.965 C1.1@14.681,28.061 ; C2.1@14.624,25.943 17.612,25.943 C21.1 23.612,25.943 23.612,25.962 24.386,26.736 v1(24.386,26.834) 24.388,26.832 24.426,26.832 24.58,26.594 24.606,26.553 24.849,26.177 C23.1 ; C2.1@14.624,25.965 14.681,26.022 C1.1@14.681,28.061 ; D1.3 14.681,30.099 C1.1@14.681,28.061 ; 17.108,20.853 17.353,20.608 VT4.S@17.353,21.258 ; v1(31.13,19.598) C15.1 v1(31.13,21.098) C39.1 ; C13.2 C13.2@37.071,2.132 ; X1.2@37.071,8.991 X1.2
  Bottom Layer w0.5: v1@1.264,10.452 VD2.1@2.47,10.452
  Bottom Layer w0.6: C7.1 1.37,23.48 1.655,23.48 1.771,23.597 D3.6
  Bottom Layer w0.8: v1@1.219,21.26 C7.1@1.219,23.304 ; C6.1@1.232,18.948 1.232,20.203 ; v1@1.232,21.196 1.232,20.203 ; v1@1.235,10.455 C8.1@1.235,12.227 ; v1(1.245,26.405) 1.245,29.344 1.479,29.578 R5.1 ; D4.4 1.232,20.203 ; R4.1 13.987,26.467
  Bottom Layer w1: v1@1.26,10.431 1.26,9.498 1.846,8.912 5.942,8.912 6.528,9.498 6.528,11.087 C30.1 ; v1(12.313,20.949) C3.1@12.313,22.409 ; v1@24.58,26.594 VD12.1 ; C13.2@37.071,2.132 X1.2@37.071,8.991
  Bottom Layer w2: C37.2 14.184,7.5 14.202,7.518 v1(16.459,7.518) 16.485,7.493 v1(18.72,7.493) 19.812,7.493 v1(19.819,7.5) v1(20.98,7.5) v1(22.243,7.5) C27.2 ; TV1.6 36.25,14.365 37.08,13.535 X1.2@37.08,9.135
  other v1: 17.602,7.493 37.084,11.331 37.084,12.55 35.509,12.573 32.414,18.106 33.735,19.503 32.389,19.529 33.71,21.053 32.36,21.082 19.787,26.848
GND_SEC: C11.1 C14.2 C18.2 C26.2 C31.2 C32.1 C33.2 C34.1 C35.2 C36.1 C40.2 C41.1 C42.2 C43.1 C48.1 D2.3 R7.1 R25.1 TV1.8 TV1.9 VD4.1 VD5.2 VD7.2 VD10.1 VD13.1 VD14.2 X3.1 X3.2 | length 154
  Top Layer w1.5: C31.2 23.5,70.231 ; X3.1 23.5,70.231 ; TV1.9 28.75,39.5 ; v1(27.661,50.698) 27.686,50.724 28.75,50.724 ; TV1.8 28.75,39.5 ; C11.1 33.022,54.496 32.22,54.496 30.647,52.923 30.647,51.602 29.769,50.724 28.75,50.724 ; C32.1 33.238,70.231 23.5,70.231 ; 28.75,39.5 28.75,50.724
  Bottom Layer w1: C42.2@14.006,74.082 C42.2@14.168,74.244 ; C42.2@14.016,74.244 14.159,74.101 C31.2 14.159,70.015 14.527,69.646 C35.2 ; C42.2@14.349,74.251 14.353,74.248 C36.1@33.147,74.248 ; C14.2@14.438,54.432 C14.2@14.654,54.432 ; C33.2@14.503,58.245 C35.2@14.503,66.245 ; C14.2@14.527,54.802 C33.2 ; C14.2 14.781,54.458 15.181,54.058 15.31,54.058 16.559,52.809 16.559,50.89 VD4.1 16.763,50.711 30.227,50.711 VD5.2 30.322,50.724 30.647,51.049 30.647,52.847 32.193,54.393 32.919,54.393 33.147,54.621 C43.1@33.147,66.245 ; C48.1 23.422,47.448 ; D2.3 23.422,47.448 ; X3.1 X3.2 ; C26.2 23.848,36.782 24.048,36.982 24.048,38.641 24.634,39.227 25.977,39.227 TV1.9 TV1.8 31.537,39.213 32.688,39.213 33.356,38.545 33.356,37.058 33.556,36.858 C18.2 ; R25.1 23.422,47.448 ; C43.1 33.227,70.22 C32.1 C36.1@33.314,74.203
  other v1: 30.632,52.578 31.434,53.71 23.5,65.27
NetC1_2: C1.2 D1.4 R1.1 | length 4.9
  Bottom Layer w0.4: R1.1 11.532,27.677 11.824,27.97 12.642,27.97 C1.2 12.59,28.266 12.59,29.385 12.217,29.758 D1.4
NetC3_2: C3.2 D3.4 | length 2.2
  Bottom Layer w0.4: D3.4 8.795,22.407 9.407,22.407 9.429,22.428 C3.2
NetC4_1: C4.1 R8.2 | length 1.5
  Bottom Layer w1: C4.1 R8.2
NetC4_2: C4.2 D1.2 D2.1 R6.1 | length 33.4
  Top Layer w1.5: v1(8.611,43.358) 15.333,43.358 19.863,47.887 v1(19.863,52.603)
  Bottom Layer w1: v1(8.611,43.358) 9.449,42.52 ; R6.1 9.449,42.52 ; D1.2 14.757,41.959 14.172,42.545 9.474,42.545 9.449,42.52 ; v1(19.863,52.603) 20.422,53.163 22.462,53.163 22.522,53.223 22.522,53.505 22.649,53.632 C4.2
NetC5_1: C5.1 L4.2 VD1.2 | length 7.5
  Bottom Layer w0.4: L4.2 L4.2@30.579,5.272 ; C5.1@34.062,5.272 C5.1
  Bottom Layer w1: VD1.2 28.702,5.799 29.13,5.371 L4.2 ; L4.2@30.579,5.272 C5.1@34.062,5.272
NetC9_1: C9.1 C47.1 R24.1 VD3.1 VD4.2 | length 15.8
  Bottom Layer w1: VD3.1 VD4.2 12.75,47.939 12.409,47.598 C47.1 R24.1 14.503,47.392 14.503,44.985 15.089,44.399 18.214,44.399 18.464,44.149 C9.1
NetC9_2: C9.2 C10.2 TV1.10 | length 7.3
  Bottom Layer w1: TV1.10 21.25,39.822 22.264,40.836 C9.2 C10.2
NetC10_1: C10.1 C49.1 R26.1 VD5.1 VD6.2 | length 16.1
  Bottom Layer w1: C10.1 28.376,44.247 31.824,44.247 32.409,44.833 C49.1 34.24,47.448 R26.1 34.559,47.598 34.24,47.918 VD5.1 VD6.2
NetC12_1: C12.1 C15.2 C17.1 C20.2 C22.1 C24.1 C25.2 C38.1 C39.2 TV1.4 | length 18
  Bottom Layer w0.4: TV1.4 27.984,14.5 28.13,14.646 C17.1 ; C22.1 29.629,21.947 C39.2 ; C17.1 C24.1 C12.1 C38.1 C39.2 ; C17.1 C20.2 C25.2 C15.2 C39.2
NetC16_1: C16.1 C19.1 C29.1 D4.6 R17.1 R22.1 TV1.2 VT3.S VT4.D | length 9.2
  Bottom Layer w0.4: D4.6 16.493,18.813 16.535,18.771 ; TV1.2@15.892,15.09 15.892,14.858 TV1.2 TV1.2@16.458,14.708 ; VT4.D@19.569,20.688 19.569,20.904
NetC16_2: C16.2 C19.2 D4.8 R16.2 | length 5.9
  Bottom Layer w0.4: D4.8 10.631,16.153 C16.2 10.763,16.021 C19.2@10.763,14.51 ; R16.2@9.297,13.791 9.297,14.478 C19.2
NetC18_1: C18.1 L5.2 VD8.2 | length 6.3
  Bottom Layer w1: L5.2@30.427,34.646 30.427,34.408 30.827,34.008 C18.1 33.806,33.908 36.17,33.908 VD8.2
NetC22_2: C22.2 R21.2 | length 1.5
  Bottom Layer w0.4: C22.2 R21.2
NetC27_1: C27.1 L3.2 X1.1 | length 16.8
  Top Layer w1.5: C27.1 24.011,2.489 31.414,2.489 32,3.075 X1.1
  Bottom Layer w2: L3.2 22.1,3.803 23.005,2.898 23.602,2.898 C27.1
NetC29_2: C29.2 R15.2 R20.2 | length 3
  Bottom Layer w0.4: C29.2@22.023,17.324 C29.2 22.085,17.361 23.507,17.361 R15.2 R20.2
NetC30_2: C30.2 R17.2 R22.2 | length 3
  Bottom Layer w0.4: C30.2@9.271,12.23 C30.2 10.739,12.243 10.751,12.231 ; R22.2 10.751,11.487 10.751,12.231 ; R17.2 10.751,12.973 10.751,12.231
NetC31_1: C31.1 C35.1 C42.1 L1.1 VD10.2 VD13.2 X2.1 X2.2 | length 44.9
  Top Layer w1.5: C31.1 9.144,70.216 9.144,67.995 10.599,66.54 X2.2 v1(20,65.27) X2.1
  Bottom Layer w1: L1.1 5.283,69.645 5.869,70.231 C31.1 ; 10.167,71.99 10.167,71.396 9.159,70.388 C31.1 ; 10.167,71.991 10.167,74.196 C42.1@10.216,74.244 ; C35.1 10.727,67.145 10.477,67.395 9.73,67.395 9.144,67.98 v1(9.144,68.783) 9.159,68.798 C31.1 ; VD10.2 17.718,70.053 20,70.053 ; X2.1 X2.2 20,70.053 ; VD13.2 21.282,70.053 20,70.053
  other v1: 9.437,67.687
NetC32_2: C32.2 C36.2 C43.2 L2.1 VD7.1 VD14.1 X4.1 X4.2 | length 45.6
  Top Layer w1.5: X4.1 v1(27,65.27) X4.2 36.902,66.54 38.176,67.814 v1(38.176,67.843) 38.303,67.97 38.303,70.296 C32.2
  Bottom Layer w1: VD14.1 27.05,70.271 ; X4.1 v1(27,65.27) X4.2 ; X4.2@27.05,66.59 27.05,70.271 ; VD7.1 27.05,70.271 ; C43.2 37.027,67.145 37.277,67.395 37.727,67.395 38.303,67.97 38.303,70.296 C32.2 ; C36.2 37.354,73.994 37.354,71.293 38.314,70.333 C32.2 ; L2.1 42.494,69.721 41.908,70.307 C32.2
  other v1: 38.303,69.012
NetC47_2: C47.2 R23.2 | length 2.1
  Bottom Layer w1: R23.2 C47.2
NetC48_2: C48.2 R24.2 | length 2.1
  Bottom Layer w1: R24.2 C48.2
NetC49_2: C49.2 R25.2 | length 2.1
  Bottom Layer w1: R25.2 C49.2
NetC50_2: C50.2 R26.2 | length 2.1
  Bottom Layer w1: R26.2 C50.2
NetD1_1: D1.1 R3.1 R6.2 | length 15
  Bottom Layer w1: R6.2 D1.1@12.217,39.103 ; D1.1 D1.1@12.217,39.103 ; R3.1 19.19,37.694 12.801,37.694 12.552,37.914 cw(c13.217,38.661) 12.475,37.992 12.217,38.277 12.217,38.661 D1.1@12.217,39.103
NetD2_2: D2.2 R8.1 R9.2 R14.1 | length 7.9
  Bottom Layer w1: R8.1 R8.1@24.202,55.321 ; D2.2 24.322,53.223 24.322,53.505 24.202,53.625 R8.1@24.202,55.321 ; R14.1@27.457,57.958 R14.1 27.483,55.907 26.897,55.321 26.187,55.321 R8.1@24.202,55.321
NetD3_1: D3.1 R5.2 | length 1.7
  Bottom Layer w0.4: D3.1@8.562,26.289 R5.2@8.562,27.991
NetD3_2: D3.2 R1.2 R4.2 | length 4
  Bottom Layer w0.4: D3.2@8.658,24.93 D3.2 10.914,24.867 ; R1.2 13.068,24.854 R4.2@13.075,24.86
NetD3_5: D3.5 D4.3 | length 6.8
  Bottom Layer w0.4: D3.5 4.998,22.207 5.232,21.972 5.232,19.048 4.998,18.813 D4.3
NetD3_8: D3.8 D4.2 | length 13.6
  Bottom Layer w0.4: D3.8 5.714,26.257 6.096,25.874 6.096,17.926 5.714,17.543 D4.2
NetD4_5: D4.5 R19.1 | length 7.3
  Bottom Layer w0.4: D4.5 8.77,20.053 9.348,20.053 9.463,19.939 13.449,19.939 13.741,20.232 R19.1@13.741,22.174
NetD4_7: D4.7 R18.1 | length 2.1
  Bottom Layer w0.4: D4.7 8.629,17.535 10.71,17.535 R18.1
NetR7_2: R7.2 R9.1 | length 1.4
  Bottom Layer w1: R7.2 R9.1
NetR10_1: R10.1 R11.2 | length 2.1
  Bottom Layer w1: R10.1@8.687,4.755 R11.2
NetR12_1: R12.1 R13.2 | length 2.4
  Bottom Layer w1: R12.1 20.053,60.744 22.212,60.744 R13.2
NetR13_1: R13.1 R14.2 | length 2.4
  Bottom Layer w1: R13.1 25.24,60.744 27.394,60.744 R14.2
NetR16_1: R16.1 VD9.2 | length 1.8
  Bottom Layer w0.4: VD9.2@6.071,13.386 6.274,13.589 7.557,13.589 R16.1
NetR18_2: R18.2 VT3.G | length 12.7
  Top Layer w0.8: v1(13.488,17.576) 13.488,18.035 15.062,19.609 18.264,19.609 v1(21.419,22.763)
  Bottom Layer w0.4: R18.2 12.344,17.551 13.463,17.551 v1(13.488,17.576) ; v1(21.419,22.763) 21.604,22.578 22.482,22.578 22.492,22.568 VT3.G
NetR19_2: R19.2 VT4.G | length 2.2
  Bottom Layer w0.4: R19.2@15.341,22.174 15.341,22.177 15.723,22.558 VT4.G
NetR21_1: R21.1 VD11.1 VD12.2 | length 39.4
  Top Layer w1: v1(2.979,28.386) 30.618,28.386 32.842,26.162 v1@32.842,24.867
  Bottom Layer w0.4: v1@2.914,28.467 3.06,28.321 VD11.1 ; VD12.2@30.449,26.581 VD12.2 30.436,24.858 ; v1(32.834,24.875) 32.817,24.858 30.436,24.858 ; 30.436,24.858 30.436,24.841 R21.1 29.646,24.858 30.436,24.858
NetTV1_5: TV1.5 VD1.1 | length 5.2
  Bottom Layer w1: VD1.1 28.752,10.617 29.134,10.617 31.189,12.672 31.189,14.439 TV1.5
NetTV1_7: TV1.7 VD8.1 | length 2.6
  Bottom Layer w1: VD8.1 36.235,36.972 36.235,39.485 TV1.7
OC: C2.2 D3.3 R2.2 VD11.2 | length 14.5
  Bottom Layer w0.4: VD11.2 6.988,28.321 7.038,28.271 7.038,28.021 7.049,28.01 7.049,23.856 7.284,23.622 8.569,23.622 D3.3 14.256,23.597 14.402,23.743 14.402,24.143 C2.2 ; C2.2@14.602,24.346 C2.2 ; R2.2 16.091,24.346 C2.2
pads on no net: TV1.3

## Polygon pours and split planes (outlines as drawn)
GND on Bottom Layer "GND_L02_P008" (solid, pour order 8): 17.653,22.083 16.84,22.083 16.84,21.438 14.427,21.438 14.427,20.117 17.653,20.117
GND on Bottom Layer "GND_L02_P006" (solid, pour order 6): 35.839,1.295 35.865,1.27 38.481,1.27 38.506,1.245 38.506,22.377 30.582,22.377 30.582,16.739 34.493,16.739 34.493,7.061 35.839,7.061
NetC16_1 on Bottom Layer "NETC16_1_L02_P005" (solid, pour order 5): 22.804,22.08 22.804,19.944 22.809,19.939 22.504,19.939 22.504,18.415 20.955,18.415 20.955,16.739 18.72,16.739 18.72,10.897 11.862,10.897 11.862,16.535 11.836,16.561 15.392,16.561 15.392,19.558 15.443,19.609 18.161,19.609 18.161,22.073 18.169,22.08 22.415,22.08
100В on Bottom Layer "100В_L02_P002" (solid, remove dead copper, pour order 2): 24.587,16.688 27.102,16.688 27.102,24.892 27.102,24.917 27.102,24.943 17.094,24.943 17.094,23.673 23.216,23.673 23.216,19.914 24.587,19.914
GND on Bottom Layer "GND_L02_P001" (solid, remove dead copper, pour order 1): 25.629,25.425 14.021,25.451 13.996,31.191 15.469,31.191 15.469,27.229 25.629,27.229
NetC12_1 on Bottom Layer (solid, pour order 0): 30.048,23.818 29.205,23.818 29.205,22.323 27.686,22.323 27.686,16.205 24.333,16.205 24.333,12.268 29.127,12.268 29.127,16.281 30.048,16.281
NetC27_1 on Top Layer "NETC27_1_L01_P011" (solid, pour order 11): 33.731,10.25 30.226,10.25 30.226,7.188 27.28,4.242 22.555,4.242 22.555,0.737 22.581,0.762 33.731,0.762
GND on Top Layer "GND_L01_P010" (solid, pour order 10): 34.493,7.061 34.747,7.061 38.557,7.01 38.557,22.327 38.506,22.377 31.902,22.377 31.902,25.705 30.048,27.559 17.704,27.559 17.704,25.598 17.986,25.316 28.256,25.316 28.256,16.739 34.493,16.739

## Keep-outs
Keep-Out Layer:
  the board outline again, w0.25

## Silkscreen, mask and mechanical layers (free items; w line width, h text height)
Top Overlay:
  circle w0.254: c3.5,74 r3.5
  circle w0.254: c3.5,74 r3.5
  circle w0.254: c3.5,3.5 r3.5
  circle w0.254: c3.5,3.5 r3.5
  circle w0.254: c43.5,3.5 r3.5
  circle w0.254: c43.5,3.5 r3.5
  circle w0.254: c3.5,37.25 r3.5
  circle w0.254: c3.5,37.25 r3.5
  circle w0.254: c43.5,37.25 r3.5
  circle w0.254: c43.5,37.25 r3.5
  circle w0.254: c43.5,74 r3.5
  circle w0.254: c43.5,74 r3.5
Bottom Overlay:
  circle w0.254: c3.5,37.25 r3.5
  circle w0.254: c43.5,37.25 r3.5
  circle w0.254: c3.5,3.5 r3.5
  circle w0.254: c43.5,3.5 r3.5
  circle w0.254: c43.5,74 r3.5
  circle w0.254: c3.5,74 r3.5